# EAGLE board Clock Schematic v.4 (EAGLE 9.3.0)
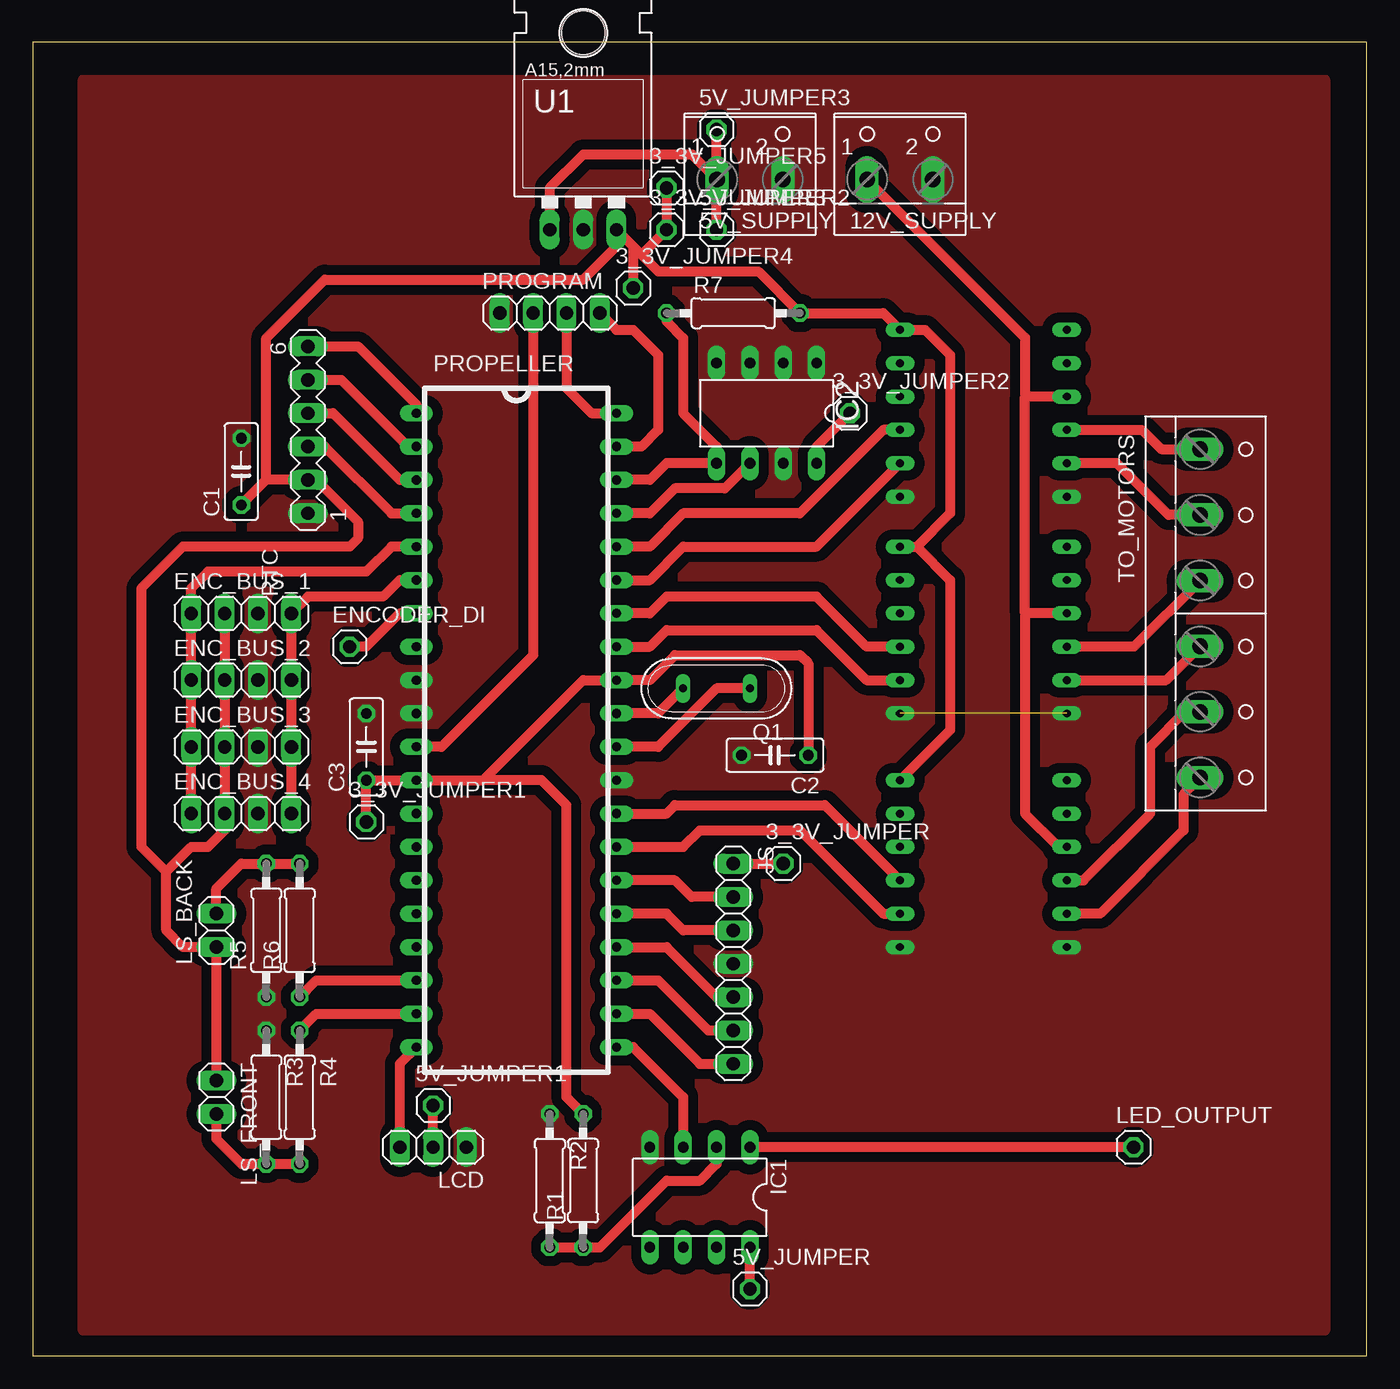
[diagram p0: board, top side]
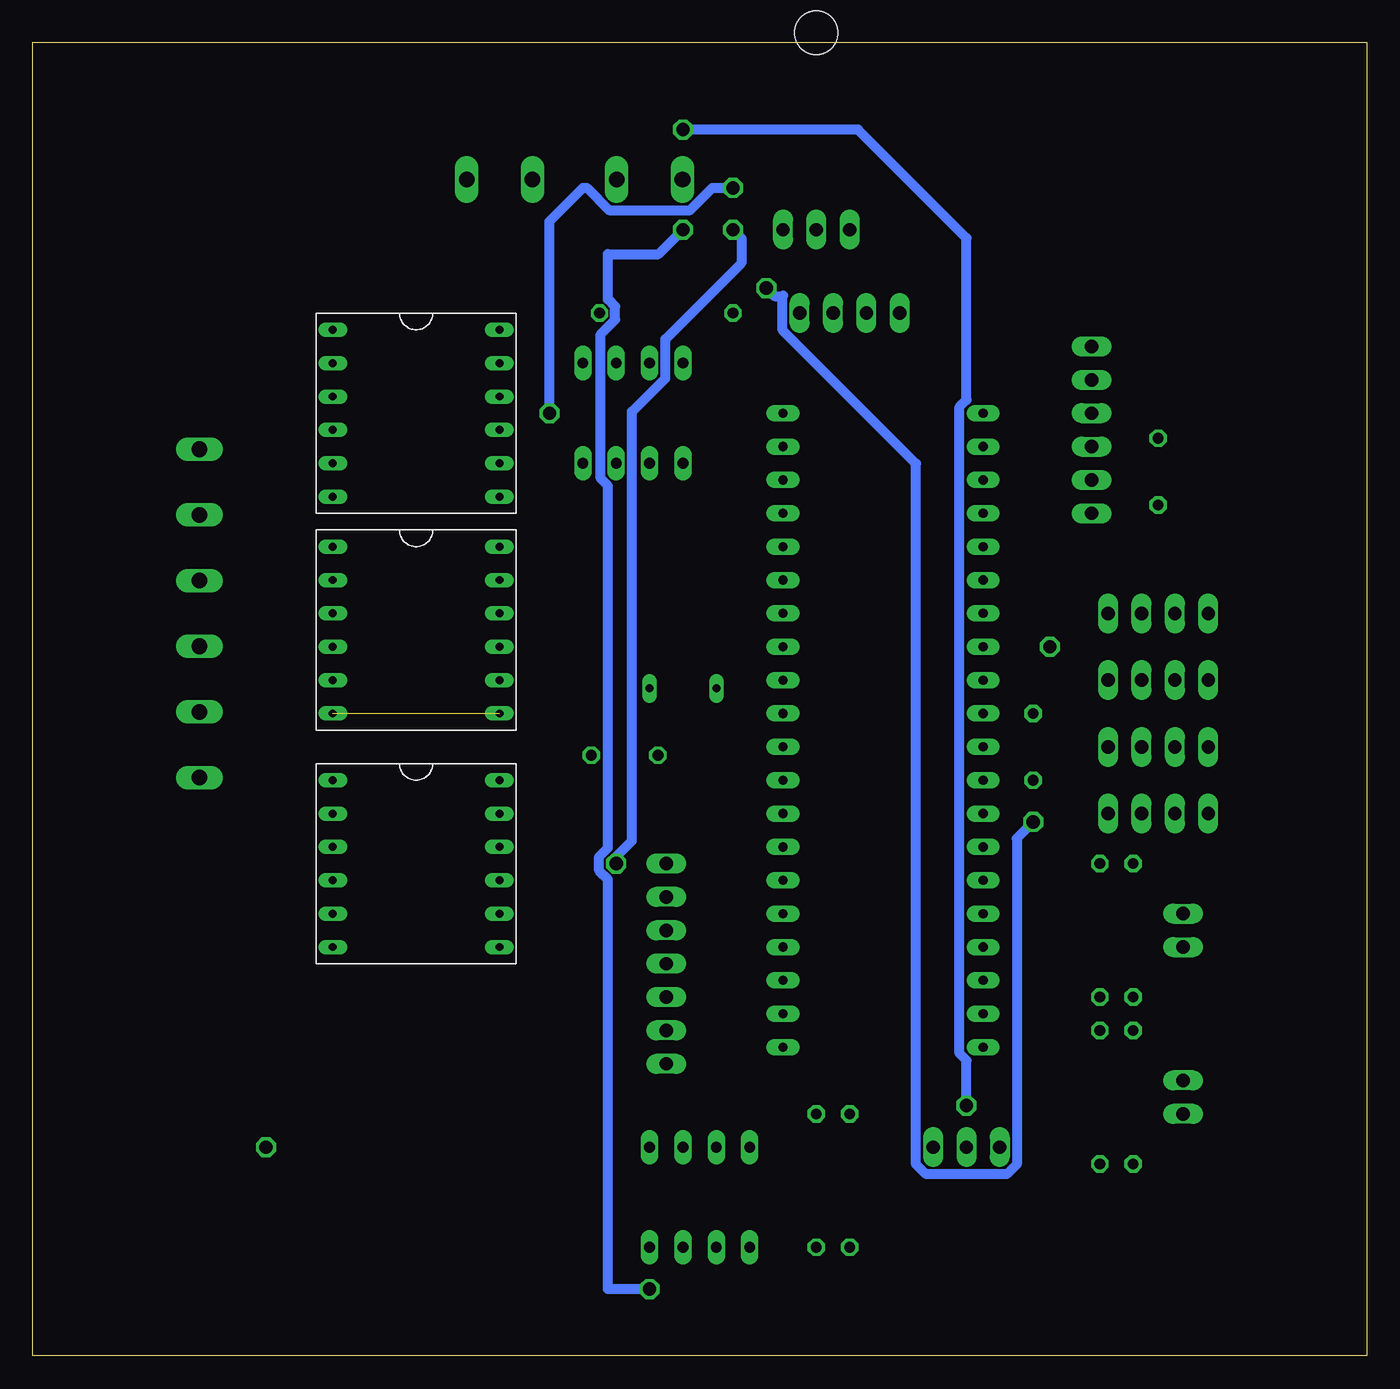
[diagram p1: board, bottom side, seen from below]

Size 101.58 x 100 mm. Coordinates in mm from the lower left corner, seen from the top.
Outline: 0,0 101.58,0 101.58,100 0,100 0,0
Copper layers (1*16): Top 0.035mm / dielectric 1.5mm / Bottom 0.035mm
Design rules "default *": minimum track width 6mil, minimum drill 0.35mm, track to track 30mil, track to pad 6mil, pad to pad 6mil, via to via 6mil, smd to smd 6mil, copper to edge 40mil, drill to drill 6mil, minimum pad ring 10mil, minimum via ring 8mil, stop-mask expansion 4mil, vias tented up to drill 0mil, thermal gap 10mil

## Footprints (pad centres in the part's own frame; a part is rotated, then mirrored left to right if it is on the bottom)
1X01 = drill 1.016 octagon: 1 0,0
W237-102 = drill 1.194 long: 1 -2.5,-1.27; 2 2.5,-1.27
C050-025X075 = drill 0.813 octagon: 1 -2.54,0; 2 2.54,0
1X04 = drill 1.016 long: 1 -3.81,0; 2 -1.27,0; 3 1.27,0; 4 3.81,0
DRV = drill 0.6 long: P$1 1.27,1.27; P$2 1.27,3.81; P$3 1.27,6.35; P$4 1.27,8.89; P$5 1.27,11.43; P$6 1.27,13.97; P$7 13.97,13.97; P$8 13.97,11.43; P$9 13.97,8.89; P$10 13.97,6.35; P$11 13.97,3.81; P$12 13.97,1.27
DIL08 = drill 0.813 long: 1 -3.81,-3.81; 2 -1.27,-3.81; 3 1.27,-3.81; 4 3.81,-3.81; 5 3.81,3.81; 6 1.27,3.81; 7 -1.27,3.81; 8 -3.81,3.81
DIL8 = drill 0.813 long: 1 -3.81,-3.81; 2 -1.27,-3.81; 3 1.27,-3.81; 4 3.81,-3.81; 5 3.81,3.81; 6 1.27,3.81; 7 -1.27,3.81; 8 -3.81,3.81
1X07 = drill 1.016 long: 1 -7.62,0; 2 -5.08,0; 3 -2.54,0; 4 0,0; 5 2.54,0; 6 5.08,0; 7 7.62,0
1X03 = drill 1.016 long: 1 -2.54,0; 2 0,0; 3 2.54,0
1X02 = drill 1.016 long: 1 -1.27,0; 2 1.27,0
P8X32A-D40 = drill 0.7 pad 1.27 long: 1 -7.62,23.495; 2 -7.62,20.955; 3 -7.62,18.415; 4 -7.62,15.875; 5 -7.62,13.335; 6 -7.62,10.795; 7 -7.62,8.255; 8 -7.62,5.715; 9 -7.62,3.175; 10 -7.62,0.635; 11 -7.62,-1.905; 12 -7.62,-4.445; 13 -7.62,-6.985; 14 -7.62,-9.525; 15 -7.62,-12.065; 16 -7.62,-14.605; 17 -7.62,-17.145; 18 -7.62,-19.685; 19 -7.62,-22.225; 20 -7.62,-24.765; 21 7.62,-24.765; 22 7.62,-22.225; 23 7.62,-19.685; 24 7.62,-17.145; 25 7.62,-14.605; 26 7.62,-12.065; 27 7.62,-9.525; 28 7.62,-6.985; 29 7.62,-4.445; 30 7.62,-1.905; 31 7.62,0.635; 32 7.62,3.175; 33 7.62,5.715; 34 7.62,8.255; 35 7.62,10.795; 36 7.62,13.335; 37 7.62,15.875; 38 7.62,18.415; 39 7.62,20.955; 40 7.62,23.495
QS = drill 0.61 long: 1 -2.54,0; 2 2.54,0
0207/10 = drill 0.813 octagon: 1 -5.08,0; 2 5.08,0
MA06-1 = drill 1.016 long: 1 -6.35,0; 2 -3.81,0; 3 -1.27,0; 4 1.27,0; 5 3.81,0; 6 6.35,0
W237-6 = drill 1.194 long: 1 -12.5,-1.27; 2 -7.5,-1.27; 3 -2.5,-1.27; 4 2.5,-1.27; 5 7.5,-1.27; 6 12.5,-1.27
78XXL = drill 1.016 long: GND 0,-3.81; IN -2.54,-3.81; OUT 2.54,-3.81 | hole 3.302: 0,11.176

## Placement (x,y rotation side)
3_3V_JUMPER  [1X01]  57.15,37.47 0 top
3_3V_JUMPER1  [1X01]  25.4,40.64 0 top
3_3V_JUMPER2  [1X01]  62.23,71.75 0 top
3_3V_JUMPER3  [1X01]  48.26,85.72 0 top
3_3V_JUMPER4  [1X01]  45.72,81.28 0 top
3_3V_JUMPER5  [1X01]  48.26,88.9 0 top
5V_JUMPER  [1X01]  54.61,5.08 0 top
5V_JUMPER1  [1X01]  30.48,19.05 0 top
5V_JUMPER2  [1X01]  52.07,85.72 0 top
5V_JUMPER3  [1X01]  52.07,93.34 0 top
5V_SUPPLY  [W237-102]  54.61,90.81 0 top
12V_SUPPLY  [W237-102]  66.04,90.81 0 top
C1  0.1uF  [C050-025X075]  15.88,67.31 90 top
C2  [C050-025X075]  56.52,45.72 180 top
C3  [C050-025X075]  25.4,46.35 90 top
ENC_BUS_1  [1X04]  15.88,56.52 0 top
ENC_BUS_2  [1X04]  15.88,51.44 0 top
ENC_BUS_3  [1X04]  15.88,46.35 0 top
ENC_BUS_4  [1X04]  15.88,41.27 0 top
ENCODER_DI  [1X01]  24.13,53.98 0 top
EXTEND  DRV  [DRV]  80.01,29.84 0 bottom
HG  DRV  [DRV]  80.01,47.62 0 bottom
IC1  MAX907CPA  [DIL08]  50.8,12.06 180 top
IC2  24LC256P  [DIL8]  55.88,71.75 180 top
JS  [1X07]  53.34,29.84 270 top
LCD  [1X03]  30.48,15.88 180 top
LED_OUTPUT  [1X01]  83.82,15.88 0 top
LS_BACK  [1X02]  13.97,32.38 90 top
LS_FRONT  [1X02]  13.97,19.68 270 top
PROGRAM  [1X04]  39.37,79.38 0 top
PROPELLER  P8X32A-D40  [P8X32A-D40]  36.83,48.26 0 top
Q1  [QS]  52.07,50.8 180 top
R1  [0207/10]  41.91,13.34 90 top
R2  [0207/10]  39.37,13.34 270 top
R3  10k  [0207/10]  17.78,19.68 270 top
R4  470  [0207/10]  20.32,19.68 270 top
R5  10k  [0207/10]  17.78,32.38 90 top
R6  470  [0207/10]  20.32,32.38 90 top
R7  10k  [0207/10]  53.34,79.38 0 top
ROTATE  DRV  [DRV]  80.01,64.14 0 bottom
RTC  [MA06-1]  20.95,70.48 90 top
TO_MOTORS  [W237-6]  90.17,56.52 270 top
U1  [78XXL]  41.91,89.53 0 top

## Library data of the parts
3_3V_JUMPER 3_3V_JUMPER1-3_3V_JUMPER5 5V_JUMPER 5V_JUMPER1-5V_JUMPER3 ENC_BUS_1-ENC_BUS_4 ENCODER_DI JS LCD LED_OUTPUT LS_BACK LS_FRONT PROGRAM = pinhead
5V_SUPPLY 12V_SUPPLY = con-wago-500; MPN: 237-102; OC_FARNELL: unknown; OC_NEWARK: 70K9898
C1-C3 = rcl; SPICEPREFIX: C
EXTEND HG ROTATE = Pololu_DRV8801_Breakout
IC1 = maxim; MF: MAXIM; MPN: MAX907CPA; OC_FARNELL: unknown; OC_NEWARK: 79C3004
IC2 = microchip; MF: MICROCHIP; MPN: 24LC256-E/P; OC_FARNELL: 9757970; OC_NEWARK: 92C7169
PROPELLER = parallax_propeller
Q1 = special
R1-R7 = rcl; SPICEPREFIX: R
RTC = con-lstb; OC_FARNELL: unknown; OC_NEWARK: unknown
TO_MOTORS = con-wago-500; OC_FARNELL: unknown; OC_NEWARK: unknown
U1 = SparkFun-IC-Power

## Nets
+3V3: 3_3V_JUMPER1.1 3_3V_JUMPER2.1 3_3V_JUMPER3.1 3_3V_JUMPER4.1 3_3V_JUMPER5.1 3_3V_JUMPER.1 C1.1 C2.1 C3.1 ENC_BUS_1.2 ENC_BUS_2.2 ENC_BUS_3.2 ENC_BUS_4.2 EXTEND.P$7 HG.P$7 IC2.8 JS.1 LS_BACK.1 LS_FRONT.1 PROPELLER.12 PROPELLER.32 R1.2 R7.2 ROTATE.P$7 RTC.2 U1.OUT
+5V: 5V_JUMPER1.1 5V_JUMPER2.1 5V_JUMPER3.1 5V_JUMPER.1 5V_SUPPLY.1 IC1.8 LCD.2 U1.IN
+12V: 12V_SUPPLY.1 EXTEND.P$4 HG.P$4 ROTATE.P$4
ENC_CLK: ENC_BUS_1.4 ENC_BUS_2.4 ENC_BUS_3.4 ENC_BUS_4.4 PROPELLER.6
ENC_CS: ENC_BUS_1.1 ENC_BUS_2.1 ENC_BUS_3.1 ENC_BUS_4.1 PROPELLER.5
GND: 5V_SUPPLY.2 12V_SUPPLY.2 C1.2 C2.2 C3.2 ENC_BUS_1.3 ENC_BUS_2.3 ENC_BUS_3.3 ENC_BUS_4.3 EXTEND.P$1 EXTEND.P$12 HG.P$1 HG.P$12 IC1.4 IC2.1 IC2.2 IC2.3 IC2.4 IC2.7 JS.4 LCD.1 PROGRAM.1 PROPELLER.9 PROPELLER.10 PROPELLER.29 R2.1 R3.1 R5.1 ROTATE.P$1 ROTATE.P$12 RTC.1 U1.GND
N$1: ENCODER_DI.1 PROPELLER.7
N$2: JS.5 PROPELLER.24
N$3: JS.6 PROPELLER.23
N$4: JS.7 PROPELLER.22
N$5: JS.3 PROPELLER.25
N$6: JS.2 PROPELLER.26
N$7: LCD.3 PROPELLER.20
N$9: IC1.1 LED_OUTPUT.1
N$10: PROPELLER.31 Q1.2
N$11: IC1.2 R1.1 R2.2
N$12: PROPELLER.30 Q1.1
N$13: PROPELLER.19 R4.1
N$14: LS_BACK.2 R5.2 R6.2
N$15: PROPELLER.18 R6.1
N$16: IC2.6 PROPELLER.37
N$17: EXTEND.P$11 PROPELLER.27
N$18: PROGRAM.4 PROPELLER.39
N$19: PROGRAM.3 PROPELLER.40
N$20: IC2.5 PROPELLER.38 R7.1
N$21: IC1.3 PROPELLER.21
N$22: EXTEND.P$10 PROPELLER.28
N$23: HG.P$11 PROPELLER.33
N$24: HG.P$10 PROPELLER.34
N$25: PROPELLER.35 ROTATE.P$11
N$26: PROGRAM.2 PROPELLER.11
N$27: LS_FRONT.2 R3.2 R4.2
N$28: PROPELLER.36 ROTATE.P$10
N$29: ROTATE.P$3 TO_MOTORS.1
N$30: ROTATE.P$2 TO_MOTORS.2
N$31: HG.P$3 TO_MOTORS.3
N$32: HG.P$2 TO_MOTORS.4
N$33: EXTEND.P$3 TO_MOTORS.5
N$34: EXTEND.P$2 TO_MOTORS.6
RTC_CLK: PROPELLER.4 RTC.3
RTC_CS: PROPELLER.1 RTC.6
RTC_SI: PROPELLER.2 RTC.5
RTC_SO: PROPELLER.3 RTC.4

## Tracks (layer width: path | path; a pad name or v marks a point on that pad's centre or on a via)
+3V3
  Top 0.762: 67.31,61.59 69.85,64.14 69.85,76.2 67.94,78.11 ROTATE.P$7 64.77,79.38 R7.2 55.24,82.55 47.62,82.55 46.35,83.82 | HG.P$7 67.31,61.59 | EXTEND.P$7 69.85,47.62 69.85,59.05 67.31,61.59 | 44.77,85.41 U1.OUT 45.72,84.45 3_3V_JUMPER4.1 | 44.77,85.41 46.35,83.82 | LS_FRONT.1 LS_BACK.1 11.43,31.11 10.16,32.38 10.16,36.83 | 10.16,36.83 12.06,38.73 13.34,38.73 14.61,40.01 ENC_BUS_4.2 ENC_BUS_3.2 ENC_BUS_2.2 ENC_BUS_1.2 | 34.29,43.81 PROPELLER.12 C3.1 3_3V_JUMPER1.1 | 34.29,43.81 41.91,51.44 PROPELLER.32 46.99,51.44 48.9,53.34 58.42,53.34 59.05,52.7 C2.1 | 17.78,66.67 17.78,77.47 22.23,81.92 41.91,81.92 44.77,84.77 44.77,85.41 | C1.1 17.78,66.67 | 10.16,36.83 8.26,38.73 8.26,58.42 11.43,61.59 24.13,61.59 24.77,62.23 24.77,63.5 21.59,66.67 RTC.2 17.78,66.67 | R1.2 40.64,19.68 40.64,41.91 38.73,43.81 34.29,43.81 | JS.1 3_3V_JUMPER.1 | 3_3V_JUMPER2.1 59.69,69.22 IC2.8 | 46.35,83.82 3_3V_JUMPER3.1 3_3V_JUMPER5.1
  Bottom 0.762: 3_3V_JUMPER.1 57.15,38 55.96,39.2 55.96,71.87 53.42,74.41 53.42,77.39 47.62,83.19 47.62,85.09 3_3V_JUMPER3.1 | 44.48,80.67 44.48,78.08 34.31,67.92 34.31,14.58 33.56,13.82 27.4,13.82 26.64,14.58 26.64,39.4 3_3V_JUMPER1.1 | 44.48,80.67 44.45,80.7 | 3_3V_JUMPER4.1 45.11,80.67 44.48,80.67 | 3_3V_JUMPER2.1 62.23,86.36 59.69,88.9 59.39,88.9 57.7,87.21 51.52,87.21 49.83,88.9 3_3V_JUMPER5.1
+5V
  Top 0.762: 5V_SUPPLY.1 50.2,91.44 41.91,91.44 39.37,88.9 U1.IN | 5V_JUMPER.1 IC1.8 | LCD.2 5V_JUMPER1.1 | 5V_JUMPER2.1 52.07,89.5 5V_SUPPLY.1 | 5V_SUPPLY.1 52.07,89.58 5V_JUMPER3.1
  Bottom 0.762: 5V_JUMPER.1 57.78,5.08 57.78,36.27 58.45,36.93 58.45,38 57.78,38.66 57.78,66.23 58.34,66.79 58.34,77.76 57.23,78.88 57.23,79.87 57.78,80.43 57.78,83.86 53.94,83.86 5V_JUMPER2.1 | 5V_JUMPER1.1 30.48,22.48 31.01,23.01 31.01,72.24 30.48,72.77 30.48,85.09 38.73,93.34 5V_JUMPER3.1
+12V
  Top 0.762: 75.56,73.03 75.56,77.51 12V_SUPPLY.1 | 75.56,56.52 75.56,73.03 | ROTATE.P$4 75.56,73.03 | HG.P$4 75.56,56.52 | 75.56,56.52 75.56,41.27 78.11,38.73 EXTEND.P$4
ENC_CLK
  Top 0.762: PROPELLER.6 27.94,59.05 26.67,57.78 20.95,57.78 ENC_BUS_1.4 ENC_BUS_2.4 ENC_BUS_3.4 ENC_BUS_4.4
ENC_CS
  Top 0.762: PROPELLER.5 27.3,61.59 25.4,59.69 13.34,59.69 12.06,58.42 ENC_BUS_1.1 ENC_BUS_2.1 ENC_BUS_3.1 ENC_BUS_4.1
GND  (1 unrouted)
  pour Top (no thermals): 3.81,97.16 98.42,97.16 98.42,1.91 3.81,1.91
N$1
  Top 0.762: PROPELLER.7 27.94,56.52 25.4,53.98 ENCODER_DI.1
N$2
  Top 0.762: JS.5 52.07,27.3 48.26,31.11 PROPELLER.24
N$3
  Top 0.762: JS.6 51.44,24.77 47.62,28.57 PROPELLER.23
N$4
  Top 0.762: JS.7 50.8,22.23 46.99,26.04 PROPELLER.22
N$5
  Top 0.762: JS.3 49.53,32.38 48.26,33.66 PROPELLER.25
N$6
  Top 0.762: JS.2 50.16,34.92 48.9,36.2 PROPELLER.26
N$7
  Top 0.762: PROPELLER.20 27.94,22.23 LCD.3
N$9
  Top 0.762: LED_OUTPUT.1 IC1.1
N$10
  Top 0.762: Q1.2 47.62,48.9 PROPELLER.31
N$11
  Top 0.762: R2.2 R1.1 43.18,8.26 48.26,13.34 50.8,13.34 52.07,14.61 IC1.2
N$12
  Top 0.762: Q1.1 52.07,50.8 47.62,46.35 PROPELLER.30
N$13
  Top 0.762: R4.1 21.59,26.04 PROPELLER.19
N$14
  Top 0.762: R6.2 R5.2 15.88,37.47 13.97,35.56 LS_BACK.2
N$15
  Top 0.762: R6.1 21.59,28.57 PROPELLER.18
N$16
  Top 0.762: PROPELLER.37 46.99,64.14 48.9,66.04 52.7,66.04 IC2.6
N$17
  Top 0.762: PROPELLER.27 49.53,38.73 50.8,40.01 58.42,40.01 64.77,33.66 EXTEND.P$11
N$18
  Top 0.762: PROPELLER.39 46.35,69.22 47.62,70.48 47.62,76.2 45.72,78.11 44.45,78.11 PROGRAM.4
N$19
  Top 0.762: PROGRAM.3 40.64,73.66 42.55,71.75 PROPELLER.40
N$20
  Top 0.762: R7.1 48.26,78.74 49.53,77.47 49.53,71.75 52.07,69.22 IC2.5 48.26,67.94 46.99,66.67 PROPELLER.38
N$21
  Top 0.762: PROPELLER.21 45.72,23.5 49.53,19.68 IC1.3
N$22
  Top 0.762: PROPELLER.28 48.26,41.27 48.9,41.91 60.33,41.91 EXTEND.P$10
N$23
  Top 0.762: PROPELLER.33 46.99,53.98 48.26,55.24 59.69,55.24 63.5,51.44 HG.P$11
N$24
  Top 0.762: HG.P$10 63.5,53.98 59.69,57.78 48.26,57.78 46.99,56.52 PROPELLER.34
N$25
  Top 0.762: PROPELLER.35 46.99,59.05 49.53,61.59 59.69,61.59 ROTATE.P$11
N$26
  Top 0.762: PROGRAM.2 38.1,53.34 31.11,46.35 PROPELLER.11
N$27
  Top 0.762: R4.2 R3.2 15.88,14.61 13.97,16.51 LS_FRONT.2
N$28
  Top 0.762: ROTATE.P$10 64.77,70.48 58.42,64.14 49.53,64.14 46.99,61.59 PROPELLER.36
N$29
  Top 0.762: ROTATE.P$3 84.45,70.48 85.92,69.02 TO_MOTORS.1
N$30
  Top 0.762: ROTATE.P$2 82.55,67.94 86.48,64.02 TO_MOTORS.2
N$31
  Top 0.762: TO_MOTORS.3 83.86,53.98 HG.P$3
N$32
  Top 0.762: TO_MOTORS.4 86.32,51.44 HG.P$2
N$33
  Top 0.762: EXTEND.P$3 80.01,36.2 85.09,41.27 85.09,46.35 87.75,49.02 TO_MOTORS.5
N$34
  Top 0.762: TO_MOTORS.6 87.63,42.74 87.63,40.01 81.28,33.66 EXTEND.P$2
RTC_CLK
  Top 0.762: RTC.3 22.23,69.22 27.3,64.14 PROPELLER.4
RTC_CS
  Top 0.762: RTC.6 24.77,76.83 29.21,72.39 PROPELLER.1
RTC_SI
  Top 0.762: RTC.5 23.5,74.3 28.57,69.22 PROPELLER.2
RTC_SO
  Top 0.762: RTC.4 22.86,71.75 27.94,66.67 PROPELLER.3